# Altium PCB DCPBoard.PcbDoc
Units mil, origin at the board's own origin, x right, y up, seen from the top; angles counter-clockwise.
Board outline 3200 x 1300 mil, 2 copper layers (Top Layer, Bottom Layer); 58 components, 34 nets, 197 pads, 129 vias.
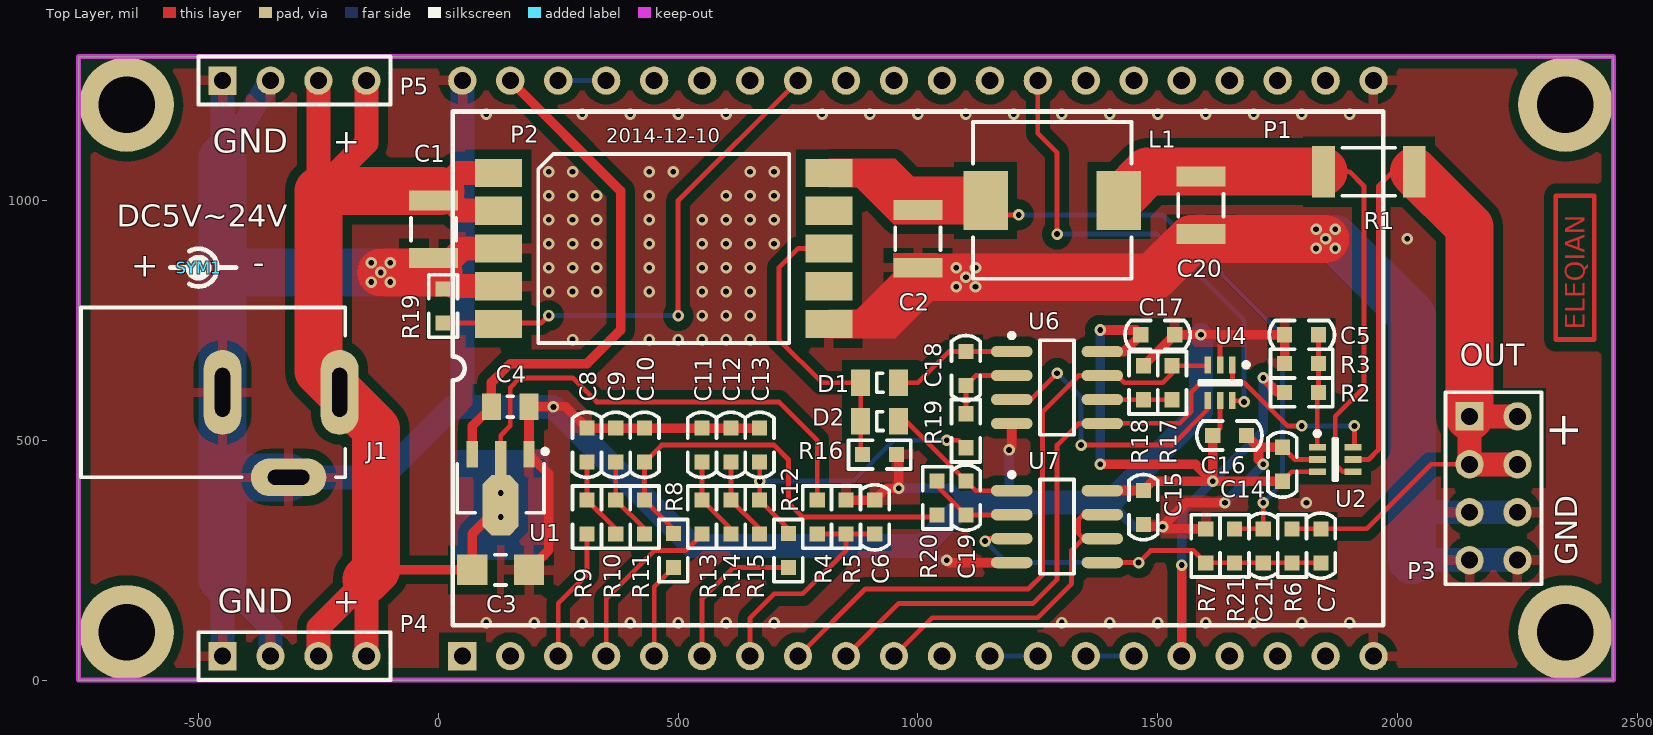
[diagram p0: Top Layer view]
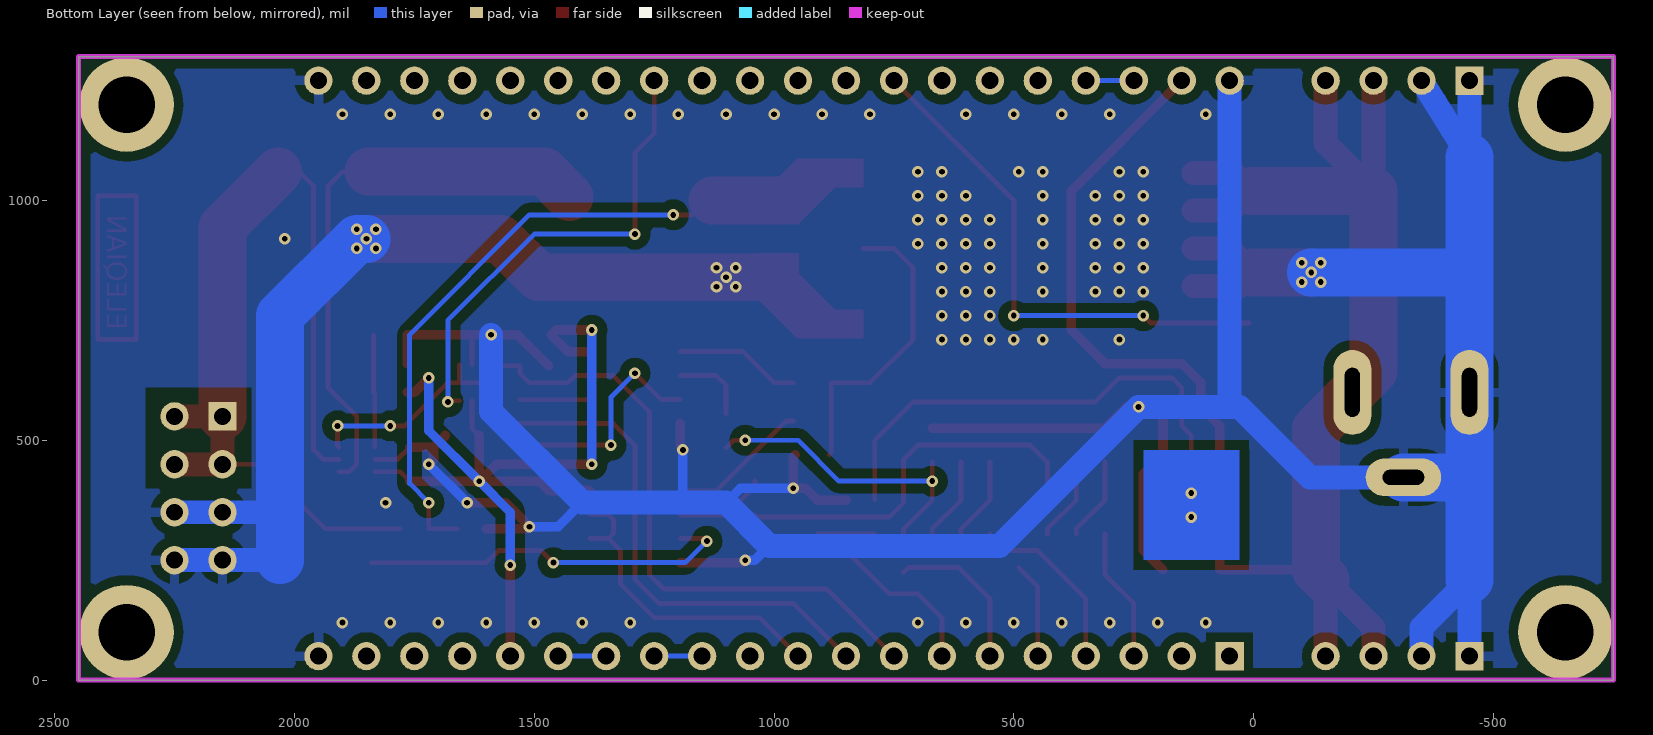
[diagram p1: Bottom Layer view, seen from below]

## Layer stack, top to bottom
Top Layer: signal copper 1.4
Dielectric: dielectric 12.6, FR-4, Dk 4.8
Bottom Layer: signal copper 1.4

## Board outline
-750,0 2450,0 2450,1300 -750,1300

## Design rules (kind name [scope] priority, off if disabled: settings)
Clearance Clearance_Polygon [InNamedPolygon('B-GND') Or InNamedPolygon('T-GND')] p1: gap=20
Clearance [All] p2: gap=10
ComponentClearance [All] p1 off: gap=10 collisioncheckmode=3 verticalgap=10 showdistances=FALSE
MinimumSolderMaskSliver [All] p1: minsoldermaskwidth=8
PolygonConnect PolygonConnect_Via [IsVia] p1: connectstyle=Direct reliefconductorwidth=10 reliefentries=4 polygonreliefangle="90 Angle"
PolygonConnect PolygonConnect_Power [InNet('GND') Or InNet('VIN') Or InNet('VOUT')] p2: connectstyle=Relief reliefconductorwidth=20 reliefentries=4 polygonreliefangle="90 Angle"
PolygonConnect [All] p3: connectstyle=Relief reliefconductorwidth=10 reliefentries=4 polygonreliefangle="90 Angle"
RoutingVias [All] p1: holewidth=24 width=48 viastyle="Through Hole" minholewidth=12 minwidth=24 maxholewidth=18 maxwidth=36
SilkscreenOverComponentPads [All] p1: minsilkscreentomaskgap=8
SolderMaskExpansion [All] p1: expansion=4
Width [All] p1: maxlimit=100 minlimit=8 preferedwidth=12
25 further rules are at their usual default settings.

## Components (designator, comment, footprint, x,y, rotation, side; value= is the part's Value field where it differs from the comment)
C1 "Cap" 1210C -10,940 r270 top
C2 "Cap" 1210C 1000,920 r270 top
C3 "Cap" 1206C 130,230 r0 top
C4 "Cap" 0805C 150,570 r0 top
C5 "Cap" 0603C 1800,720 r0 top
C6 "Cap" 0603C 910,340 r270 top
C7 "Cap" 0603C 1840,280 r90 top
C8 "Cap" 0603C 310,490 r90 top
C9 "Cap" 0603C 370,490 r90 top
C10 "Cap" 0603C 430,490 r90 top
C11 "Cap" 0603C 550,490 r90 top
C12 "Cap" 0603C 610,490 r90 top
C13 "Cap" 0603C 670,490 r90 top
C14 "Cap" 0603C 1760,450 r270 top
C15 "Cap" 0603C 1470,360 r90 top
C16 "Cap" 0603C 1650,510 r180 top
C17 "Cap" 0603C 1500,720 r180 top
C18 "Cap" 0603C 1100,650 r90 top
C19 "Cap" 0603C 1100,380 r90 top
C20 "Cap" 1210C 1590,990 r270 top
C21 "Cap" 0603C 1720,280 r90 top
D1 "1N4148" 0805D 920,620 r180 top
D2 "1N4148" 0805D 920,540 r180 top
J1 "PWR2.5" DC-005 -450,600 r0 top
L1 "CDRH8D43" INDP8080X45N 1280,1000 r0 top
P1 "MiCore" MICORE 50,50 r90 top locked
P2 "CE-A002" CE-A002 470,900 r0 top locked
P3 "Header 4X2" HDR2X4 2150,550 r270 top locked
P4 "Header 4" HDR1X4 -450,50 r0 top
P5 "Header 4" HDR1X4 -450,1250 r0 top
R1 "Res3" 2010R 1940,1060 r0 top
R2 "Res3" 0603R 1800,600 r0 top
R3 "Res3" 0603R 1800,660 r180 top
R4 "Res3" 0603R 790,340 r270 top
R5 "Res3" 0603R 850,340 r90 top
R6 "Res3" 0603R 1780,280 r270 top
R7 "Res3" 0603R 1600,280 r90 top
R8 "Res3" 0603R 490,270 r90 top
R9 "Res3" 0603R 310,340 r90 top
R10 "Res3" 0603R 370,340 r90 top
R11 "Res3" 0603R 430,340 r90 top
R12 "Res3" 0603R 730,270 r90 top
R13 "Res3" 0603R 550,340 r90 top
R14 "Res3" 0603R 610,340 r90 top
R15 "Res3" 0603R 670,340 r90 top
R16 "Res3" 0603R 920,470 r0 top
R17 "Res3" 0603R 1530,620 r270 top
R18 "Res3" 0603R 1470,620 r90 top
R19 "Res3" 0603R 1100,520 r270 top
R19 "Res3" 0603R 10,780 r90 top
R20 "Res3" 0603R 1040,380 r270 top
R21 "Res3" 0603R 1660,280 r270 top
SYM1 "Comment" PWR_SYM -500,860 r180 top
U1 "HT7533" SOT89N 130,400 r270 top
U2 "INA213" SOT-363-6N 1870,460 r0 top
U4 "SN74LVC1G3157" SOT-363-6N 1630,620 r270 top
U6 "MCP6002-I/SN" SOIC-SN8_N 1290,610 r0 top
U7 "MCP6002-I/SN" SOIC-SN8_N 1290,320 r0 top

## Footprints (in the part's own frame and the unit in brackets; to place one, negate y for a bottom-side part, rotate by r counter-clockwise, add the part's x,y. Pads: shape width x height; smd on the part's side, far side on the other; paste and mask are expansions set on the pad)
0603C [mm] "贴?"
  rect 0.8x0.8 smd: 1(-0.9,0) 2(0.9,0)
  silkscreen extent -1.72,-0.76 1.74,0.76, body extent -0.9,-0.4 0.9,0.4, height 0.8
0603R [mm] "贴?"
  rect 0.8x0.8 smd: 1(-0.9,0) 2(0.9,0)
  silkscreen extent -1.65,-0.76 1.65,0.76, body extent -0.9,-0.4 0.9,0.4, height 0.45
0805C [mm] "贴?"
  rect 1x1.4 smd: 1(-1,0) 2(1,0)
  silkscreen extent -0.15,-0.55 0.15,0.55, body extent -1.07,-0.7 1.07,0.7, height 0.8
0805D [mm] "ÌùÆ"
  rect 1x1.4 smd: 1(-1,0) 2(1,0)
  silkscreen extent -0.18,-0.5 0.15,0.5, body extent -1.07,-0.7 1.07,0.7, height 1
1206C [mm] "Chip Capacitor; Body 3.2 x 1.6 mm (LxW typ)"
  rect 1.6x1.6 smd: 1(-1.5,0) 2(1.5,0)
  silkscreen extent -0.3,-0.8 0.3,0.8, body extent -1.6,-0.8 1.6,0.8, height 0.8
1210C [mm] "Chip Capacitor, 2-Leads, Body 3.2x2.5mm, IPC Medium Density"
  rect 1.05x2.6 smd: 1(-1.525,0) 2(1.525,0)
  silkscreen extent -0.6,-1.2 0.6,1.2, body extent -1.65,-1.3 1.65,1.3, height 2.5
2010R [mm] "Chip Resistor, 2-Leads, Body 5.0x2.5mm, IPC Medium Density"
  rect 1.2x2.75 smd: 1(-2.4,0) 2(2.4,0)
  silkscreen extent -1.4,-1.27 1.4,1.28, body extent -2.6,-1.35 2.6,1.35, height 0.65
CE-A002 [mm] "DC-"
  rect 2.5x1.5 smd: 1(-8.75,4) 2(-8.75,2) 3(-8.75,0) 4(-8.75,-2) 5(-8.75,-4) 6(8.75,-4) 7(8.75,-2) 8(8.75,0) 9(8.75,2) 10(8.75,4)
  silkscreen extent -6.65,-5 6.65,5, body extent -9.05,-6 9.05,6, height 4
DC-005 [mm] "电?"
  oval 2x4.5 hole 0.8 slot 2.6 at 90 deg: 1(6.2,0) 2(0,0)
  oval 4x2 hole 0.8 slot 2.2 at 0 deg: 3(3.5,-4.5)
  silkscreen extent -7.5,-4.5 6.5,4.5, body extent -7.5,-4.5 6.5,4.5, height 11
HDR1X4 [mm] "Connector; Header; 4 Position"
  rect 1.5x1.5 hole 0.9: 1(0,0)
  round 1.5 hole 0.9: 2(2.54,0) 3(5.08,0) 4(7.62,0)
  silkscreen extent -1.27,-1.27 8.89,1.27
HDR2X4 [mm] "Connector; Header; 4x2 Position"
  rect 1.5x1.5 hole 0.9: 1(0,0)
  round 1.5 hole 0.9: 2(0,2.54) 3(2.54,0) 4(2.54,2.54) 5(5.08,0) 6(5.08,2.54) 7(7.62,0) 8(7.62,2.54)
  silkscreen extent -1.27,-1.27 8.89,3.81
INDP8080X45N [mm] "Precision Wire Wound Inductor, 2-Leads, Body 8.0x8.0mm, IPC Medium Density"
  rect 2.35x3.1 smd: 1(-3.525,0) 2(3.525,0)
  silkscreen extent -4.2,-4.15 4.2,4.15, body extent -4.15,-4.15 4.15,4.15, height 4.5
MICORE [mm]
  rect 1.5x1.5 hole 0.9: 1(0,0)
  round 1.5 hole 0.9: 2(0,-2.54) 3(0,-5.08) 4(0,-7.62) 5(0,-10.16) 6(0,-12.7) 7(0,-15.24) 8(0,-17.78) 9(0,-20.32) 10(0,-22.86) 11(0,-25.4) 12(0,-27.94) 13(0,-30.48) 14(0,-33.02) 15(0,-35.56) 16(0,-38.1) 17(0,-40.64) 18(0,-43.18) 19(0,-45.72) 20(0,-48.26) 21(30.48,-48.26) 22(30.48,-45.72) 23(30.48,-43.18) 24(30.48,-40.64) 25(30.48,-38.1) 26(30.48,-35.56) 27(30.48,-33.02) 28(30.48,-30.48) 29(30.48,-27.94) 30(30.48,-25.4) 31(30.48,-22.86) 32(30.48,-20.32) 33(30.48,-17.78) 34(30.48,-15.24) 35(30.48,-12.7) 36(30.48,-10.16) 37(30.48,-7.62) 38(30.48,-5.08) 39(30.48,-2.54) 40(30.48,0)
  silkscreen extent 1.64,-48.77 28.84,0.51, body extent -1.27,-50.22 31.75,1.27, height 14.05
PWR_SYM [mil]
  silkscreen extent -79,-39 59,39
SOIC-SN8_N [mm] "SOIC, 8-Leads, Body 4.9x3.8mm, Pitch 1.27mm, IPC Medium Density"
  oval 2.2x0.6 smd: 1(-2.4,1.905) 2(-2.4,0.635) 3(-2.4,-0.635) 4(-2.4,-1.905) 5(2.4,-1.905) 6(2.4,-0.635) 7(2.4,0.635) 8(2.4,1.905)
  silkscreen extent -2.52,-2.5 0.9,2.88, body extent -2,-2.5 2,2.5, height 1.75
SOT89N [mm] "SOT89, 3-Leads, Body 4.5x2.4 mm, Pitch 1.5mm, Lead Span 4.1mm, IPC Medium D"
  rect 1.4x0.6 smd: 1(-1.8,1.5) 3(-1.8,-1.5)
  rect 1.8x0.6 smd: 2(-1.6,0)
  oct 3.2x1.9 smd: 2(0.9,0)
  silkscreen extent -2.07,-2.3 1.3,2.48, body extent -1.3,-2.3 1.3,2.3, height 1.6
SOT-363-6N [mm] "SOT23, 6-Leads, Body 2.2x2.4mm (max), Pi"
  rect 0.9x0.35 smd: 1(-0.95,0.65) 2(-0.95,0) 3(-0.95,-0.65) 4(0.95,-0.65) 5(0.95,0) 6(0.95,0.65)
  silkscreen extent -1.07,-1.1 0.1,1.5, body extent -0.7,-1.07 0.7,1.08, height 1.1

## Part data
C1 C2 C3 C4 C5 C6 C7 C8 C9 C10 C11 C12 C13 C14 C15 C16 C17 C18 C19 C20 C21: "Capacitor"
D1 D2: library part "Diode 1N4148", "High Conductance Fast Diode"
J1: "Low Voltage Power Supply Connector"
L1: library part "Inductor Iron", "Magnetic-Core Inductor"
P1: "MiCore核心板"
P2: "DC-DC模块"
P3: "Header, 4-Pin, Dual row"
P4 P5: "Header, 4-Pin"
R1 R2 R3 R4 R5 R6 R7 R8 R9 R10 R11 R12 R13 R14 R15 R16 R17 R18 R19 R19 R20 R21: "Resistor"
U1: "3.3V稳压"
U2: "电流并联测量"
U4: "SPDT模拟开关"
U6 U7: "1 MHz, Low-Power Operational Amplifier, 8-Pin SOIC, Industrial Temperature"

## Free pads (board coordinates)
  round 196.85 hole 118.11: 0(-650,100) 0(-650,1200) 0(2350,100) 0(2350,1200)

## Via types
v1: diameter 24, hole 12, Top Layer to Bottom Layer, 129 vias

## Nets (pads, with @x,y where several pads share a name; then routed paths per layer and width w, separated by ;. In a path a pad name is that pad's centre, name@x,y a point inside that pad or via, vN(x,y) a via of type N, cw(c..) or ccw(c..) an arc to the next point about the centre after c; other vN are vias at no path point)
DAC_ISET: P1.6 R12.1 | length 330.9
  Top Layer w10: P1.6 550,170 614.57,234.57 720,234.57 R12.1@730,224.57
DAC_VSET: P1.5 R8.1 | length 201.1
  Top Layer w10: P1.5 450,194.57 R8.1
GND: C1.2 C2.2 C3.2 C4.2 C5.1 C6.1 C8.2 C9.2 C10.2 C11.2 C12.2 C13.2 C14.1 C15.1 C16.1 C17.1 C20.2 J1.2 J1.3 P1.20 P1.21 P1.40 P2.3 P2.4 P2.6 P3.5 P3.6 P3.7 P3.8 P4.1 P4.2 P5.1 P5.2 R3.2 R5.2 R7.2 R16.2 R18.2 R19.2@10,815.43 U1.1 U2.2 U4.2 U6.4 U7.4 | length 10532.7
  Top Layer w10: U4.2 1630,720 ; C14.1 1785.43,460 U2.2
  Top Layer w20: P2.4@119.69,815.43 P2.4 ; C3.2@189.21,229.84 230,270.63 230,429.92 U1.1 C4.2@189.06,569.69 ; C4.2 C4.2@189.06,569.69 ; C13.2 C12.2 C11.2 C10.2 C9.2 C8.2 265.75,569.69 v1(240,569.69) C4.2@189.06,569.69 ; R5.2 C6.1 934.57,400 v1(960,400) 960,465.43 R16.2 ; v1(1060,250) 1065,245 U7.4 ; v1(1190,480) 1195.51,485.51 U6.4 ; C15.1@1470,320 v1(1510,320) ; R18.2 1534.57,720 C17.1 v1(1590,720) 1630,720 C5.1 R3.2 ; R7.2 1514.57,315.43 v1(1510,320) ; v1(1640,370) 1560,370 v1(1510,320) ; C16.1 1710,485.43 ; v1(1720,450) 1710,460 1710,485.43 ; C14.1 1710,485.43
  Top Layer w50: P2.4 28.74,821.26 0,850 50,900 P2.3
  Top Layer w100: v1(-120,850) 0,850 ; C2.2@1010,839.96 1489.96,839.96 1570,920 v1(1850,920)
  Bottom Layer w20: v1(960,400) 1070,400 1100,370 ; 1010,280 1040,250 v1(1060,250) ; 1190,370 v1(1190,480) ; 1400,370 1450,320 v1(1510,320) ; v1(1640,370) v1(1720,450)
  Bottom Layer w50: P4.1 -450,210 -350,110 P4.2 ; P5.1 -450,1090 P5.2 ; J1.3 -117.17,422.83 29.69,569.69 v1(240,569.69) ; P1.40 50,569.69 v1(240,569.69) ; v1(1590,720) 1590,560 1400,370 1190,370 1100,370 1010,280 529.69,280 v1(240,569.69) ; 2030,250 P3.7 P3.8 ; 2030,350 P3.5 P3.6
  Bottom Layer w100: -450,210 -450,420 ; -450,1090 -450,850 ; J1.3 -447.17,422.83 -450,420 ; v1(-120,850) -450,850 ; v1(1850,920) 1870,920 2030,760 2030,350 2030,250 ; -450,420 J1.2 -450,850
  other v1: 100,120 200,120 300,120 400,120 500,120 600,120 700,120 1300,120 1400,120 1500,120 1600,120 1700,120 1800,120 1900,120 1810,370 280,710 440,710 500,710 550,710 600,710 650,710 550,760 600,760 650,760 230,810 280,810 330,810 440,810 550,810 600,810 650,810 1080,820 1120,820 -140,830 -100,830 1100,839.96 230,860 280,860 330,860 440,860 550,860 600,860 650,860 1080,860 1120,860 -140,870 -100,870 1830,900 1870,900 230,910 280,910 330,910 440,910 550,910 600,910 650,910 700,910 2020,920 1830,940 1870,940 230,960 280,960 330,960 440,960 550,960 600,960 650,960 700,960 230,1010 280,1010 330,1010 440,1010 600,1010 650,1010 700,1010 230,1060 280,1060 440,1060 490,1060 650,1060 700,1060 100,1180 300,1180 400,1180 500,1180 600,1180 800,1180 900,1180 1000,1180 1100,1180 1200,1180 1300,1180 1400,1180 1500,1180 1600,1180 1700,1180 1800,1180 1900,1180
NetC8_1: C8.1 R9.2 R10.1 | length 174.9
  Top Layer w10: C8.1 R9.2 370,315.43 R10.1
NetC9_1: C9.1 R10.2 R11.1 | length 174.9
  Top Layer w10: C9.1 R10.2 430,315.43 R11.1
NetC11_1: C11.1 R13.2 R14.1 | length 174.9
  Top Layer w10: C11.1 R13.2 610,315.43 R14.1
NetC12_1: C12.1 R14.2 R15.1 | length 174.9
  Top Layer w10: C12.1 R14.2 670,315.43 R15.1
NetC18_1: C18.1 R19.1@1100,555.43 U6.2 | length 163.1
  Top Layer w10: R19.1@1100,555.43 C18.1 1120.43,635 U6.2
NetC18_2: C18.2 D1.1 U6.1 | length 263.4
  Top Layer w10: D1.1 1000,620 1065.43,685.43 C18.2 1195.08,685.43 U6.1
NetC19_1: C19.1 R20.1 U7.2 | length 191.4
  Top Layer w10: R20.1 1040,404.57 C19.1 1195.08,344.57 U7.2
NetC19_2: C19.2 D2.1 U7.1 | length 296.2
  Top Layer w10: D2.1 975.43,540 C19.2 1120.43,395 U7.1
NetC20_1: C20.1 L1.2 R1.1 U2.4 | length 1186.5
  Top Layer w10: R1.1 1900,1060 1930,1030 1930,610 1870,550 1870,450 1885.59,434.41 U2.4
  Top Layer w100: L1.2@1426.39,1007.61 1478.82,1060.04 C20.1@1590,1060.04 ; C20.1@1590,1060 R1.1
NetP1_12: P1.12 P1.13 | length 100
  Bottom Layer w10: P1.12 P1.13
NetP1_14: P1.14 P1.15 | length 100
  Bottom Layer w10: P1.14 P1.15
NetP1_37: P1.37 P1.38 | length 100
  Bottom Layer w10: P1.38 P1.37
NetR17_2: R17.2 R18.1 U6.6 | length 145.5
  Top Layer w10: U6.6@1384.49,584.57 R18.1 R17.2
PWM_ISET: P1.4 R13.1 | length 375.7
  Top Layer w10: P1.4 350,170 450,270 515.43,270 R13.1
PWM_VSET: P1.3 R9.1 | length 279.4
  Top Layer w10: P1.3 250,160 310,220 R9.1
RS_EN: P1.33 P2.5 R19.1@10,744.57 | length 1089.9
  Top Layer w10: R19.1@10,744.57 214.57,744.57 v1(230,760) ; v1(500,760) 500,1000 P1.33
  Bottom Layer w10: v1(230,760) v1(500,760)
RS_IOUT: P1.28 U4.6 | length 996.6
  Top Layer w10: P1.28 1250,1140 1290,1100 v1(1290,930) ; U4.6 1677.4,582.6 v1(1680,580)
  Bottom Layer w10: v1(1290,930) 1500,930 1680,750 v1(1680,580)
V_FB: D1.2 D2.2 P2.8 R16.1 | length 630.6
  Top Layer w10: P2.8 750,900 710,860 710,710 800,620 D1.2 D2.2 880.63,473.94 R16.1
V_IOUT1: P1.9 U2.6 U4.1 U6.5 | length 1605.5
  Top Layer w10: P1.9 960,160 1240,160 1290,210 1290,490 1335,535 U6.5 1384.88,535.39 1545.39,535.39 1570,560 1570,600 1590,620 1660,620 ; U4.1 1655.59,624.41 1660,620 ; v1(1800,530) 1770,530 1680,620 1660,620 ; U2.6 1910,488.19 v1(1910,530)
  Bottom Layer w10: v1(1800,530) v1(1910,530)
V_IOUT2: P1.8 R17.1 U4.3 U6.7 | length 1327.1
  Top Layer w10: P1.8 890,190 1230,190 1260,220 1260,560 1335,635 U6.7 ; U6.7@1384.8,634.69 U6.7 ; U4.3 1602.44,655.43 R17.1 1530,640 1510,620 1430,620 1415,635 U6.7
V_IOUT_B: U4.4 U6.3 | length 601.4
  Top Layer w10: U6.3 1235,585 v1(1290,640) ; v1(1340,490) 1530,490 1604.41,564.41 U4.4
  Bottom Layer w10: v1(1290,640) 1340,590 v1(1340,490)
V_IREF: C5.2 R2.2 R3.1 U2.1 | length 235.6
  Top Layer w10: U2.1 1832.6,597.16 R2.2 R3.1 C5.2
V_ISET: C13.1 R12.2 R15.2 R19.2@1100,484.57 | length 645.6
  Top Layer w10: C13.1 v1(670,415) R15.2 730,315.43 R12.2 ; v1(1060,500) 1084.57,500 R19.2@1100,484.57
  Bottom Layer w10: v1(670,415) 865,415 950,500 v1(1060,500)
V_VIN: C6.2 P1.7 R4.2 R5.1 | length 492.6
  Top Layer w10: P1.7 650,130 700,180 760,180 850,270 R5.1 ; R4.2 R5.1 ; C6.2 R5.1
V_VOUT: C7.1 C21.1 R6.2 R7.1 R21.2 U7.3 U7.5 | length 872.6
  Top Layer w10: v1(1140,290) 1145,295 U7.3 ; U7.5 v1(1460,245) 1485,270 1574.57,270 R7.1 C21.1 C7.1
  Bottom Layer w10: v1(1140,290) 1185,245 v1(1460,245)
V_VOUT_B: P1.10 U7.6 U7.7 | length 674.7
  Top Layer w10: P1.10 1030,130 1250,130 1320,200 1320,270 U7.6@1345,295 ; U7.6 U7.6@1345,295 ; U7.7 1345,345 1335,335 1335,305 U7.6@1345,295
V_VSET: C10.1 R8.2 R11.2 R20.2 | length 915.4
  Top Layer w10: R8.2 490,315.43 R11.2 C10.1 465.43,490 700,490 730,460 730,370 760,340 1035.43,340 R20.2
VCC_3V3: C4.1 C14.2 C15.2 C16.2 C17.2 P1.16 P1.22 P1.39 R2.1 U1.3 U2.3 U4.5 U6.8 U7.8 | length 3154.9
  Top Layer w10: C16.2 1630,525.43 U4.5 ; C14.2 1779.84,434.41 U2.3
  Top Layer w20: U1.3 70.94,530.32 C4.1 110.63,620.63 150,660 310,660 380,730 380,1020 P1.39 ; v1(1380,450) 1579.13,450 v1(1614.57,414.57) ; v1(1380,730) 1454.57,730 C17.2 1429.57,685 U6.8 ; U7.8 1384.92,395.43 C15.2 1489.13,414.57 v1(1614.57,414.57) ; P1.16 v1(1550,240) ; C16.2 v1(1614.57,414.57) ; v1(1720,630) 1750,600 R2.1 ; C14.2 v1(1614.57,414.57)
  Bottom Layer w20: v1(1380,450) v1(1380,730) ; v1(1550,240) 1550,350 v1(1614.57,414.57) 1720,520 v1(1720,630)
VIN: C1.1 C3.1 J1.1 P2.1 P2.2 P4.3 P4.4 P5.3 P5.4 R4.1 U1.2 | length 3699.9
  Top Layer w10: U1.2@130,462.99 130,510 150,530 150,610 170,630 280,630 330,580 710,580 790,500 R4.1
  Top Layer w20: -130,230 C3.1 70.94,305.51 130,364.57 U1.2@130,462.99
  Top Layer w50: P4.3 -250,110 -150,210 P4.4 ; P5.3 -250,1020 -150,1120 P5.4 ; P2.2 46.26,978.74 5,1020 42.48,1057.48 P2.1
  Top Layer w100: -150,210 -130,230 -130,524.09 -250,644.09 -250,1020 C1.1@5,1020
  other v1: 130,340 130,390
VOUT: C7.2 P3.1 P3.2 P3.3 P3.4 R1.2 R6.1 U2.5 | length 1981.4
  Top Layer w10: R6.1 1935.43,315.43 2070,450 P3.3 ; U2.5 1940,460 1960,480 1960,1030 1990,1060 R1.2
  Top Layer w50: P3.4 P3.3 P3.1 P3.2
  Top Layer w100: R1.2 2150,944.49 P3.1
VOUT_PRE: C2.1 C21.2 L1.1 P2.10 R21.1 | length 1365.7
  Top Layer w10: L1.1@1129,999 1142.22,999 1171.22,970 v1(1210,970) ; R21.1 C21.2 v1(1720,370)
  Top Layer w100: C2.1@990,1000 L1.1@1128,1000
  Bottom Layer w10: v1(1210,970) 1510,970 1760,720 1760,410 v1(1720,370)
pads on no net: P1.1 P1.2 P1.11 P1.17 P1.18 P1.19 P1.23 P1.24 P1.25 P1.26 P1.27 P1.29 P1.30 P1.31 P1.32 P1.34 P1.35 P1.36 P2.7 P2.9
copper on no net: | length 760
  Top Layer w10: 2330,710 2410,710 2410,1010 2330,1010 2330,710

## Polygon pours and split planes (outlines as drawn)
GND on Top Layer "T-GND" (solid, remove dead copper, pour order 4): -750,1300 -750,0 2450,0 2450,1300
GND on Bottom Layer "B-GND" (solid, remove dead copper, pour order 2): -750,1300 2450,1300 2450,0 -750,0

## Keep-outs
Keep-Out Layer:
  the board outline again, w10

## Other copper
Top Layer:
  pour cut-out: 2090,610 2310,610 2310,400 2090,400
  region net VOUT_PRE: 814.49,1028 872,1028 950,950 1050,950 1050,990 953,1087 814.49,1087
  region net GND: 814.49,772 814.49,713 953,713 1040,800 1040,890 948,890 948,848 872,772
  pour cut-out: 1820,1134.13 2060,1134.13 2060,985.87 1820,985.87
  text "ELEQIAN" at 2390,730 h40 r90
Bottom Layer:
  rectangle net VIN: 30,250 230,480
  pour cut-out: 10,500 250,500 250,230 10,230
  pour cut-out: 2090,610 2310,610 2310,400 2090,400

## Silkscreen, mask and mechanical layers (free items; w line width, h text height)
Top Overlay:
  text "2014-12-10" at 350,1120 h30
  text "GND" at -470,1100 h50
  text "+" at -220,1100 h50
  text "DC5V~24V" at -670,930 h80
  text "GND" at -460,140 h50
  text "+" at -220,140 h50
Top Solder:
  rectangle: 2320,700 2420,1020

## Dimensions
2450,0 to 2450,1300 on Mechanical 13
-750,0 to 2450,0 on Mechanical 13

## Text inside footprints (layer, text, board x,y; h text height)
P3: Top Overlay "OUT" at 2130,640 h80; Top Overlay "GND" at 2390,240 h80 r90; Top Overlay "+" at 2400,480 h120 r90
SYM1: Top Overlay "+" at -582.68,883.62 h50 r180; Top Overlay "-" at -362.2,883.62 h50 r180